# Altium PCB RC-RF004-HCS200_V1.a PCB DIMENSIONS.PcbDoc
Units mm, origin at the board's own origin, x right, y up, seen from the top; angles counter-clockwise.
Board outline 27.71 x 52.8 mm, 3 copper layers (Top Layer, Mid-Layer 17, Bottom Layer); 5 components, 0 nets, 14 pads, 0 vias.
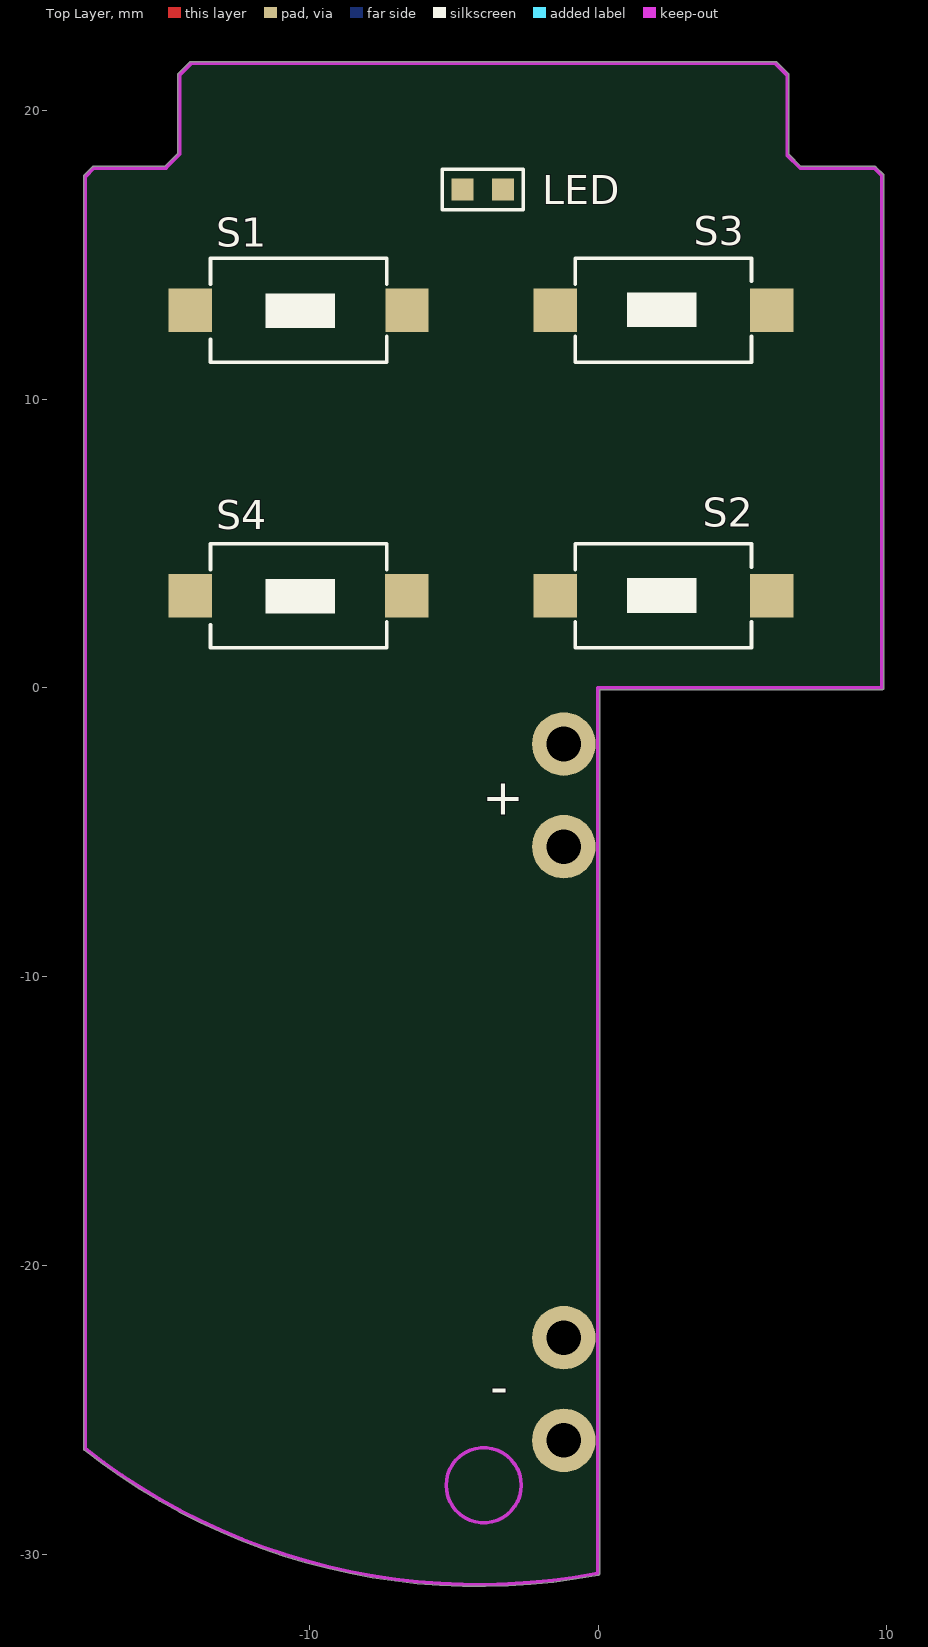
[diagram p0: Top Layer view]
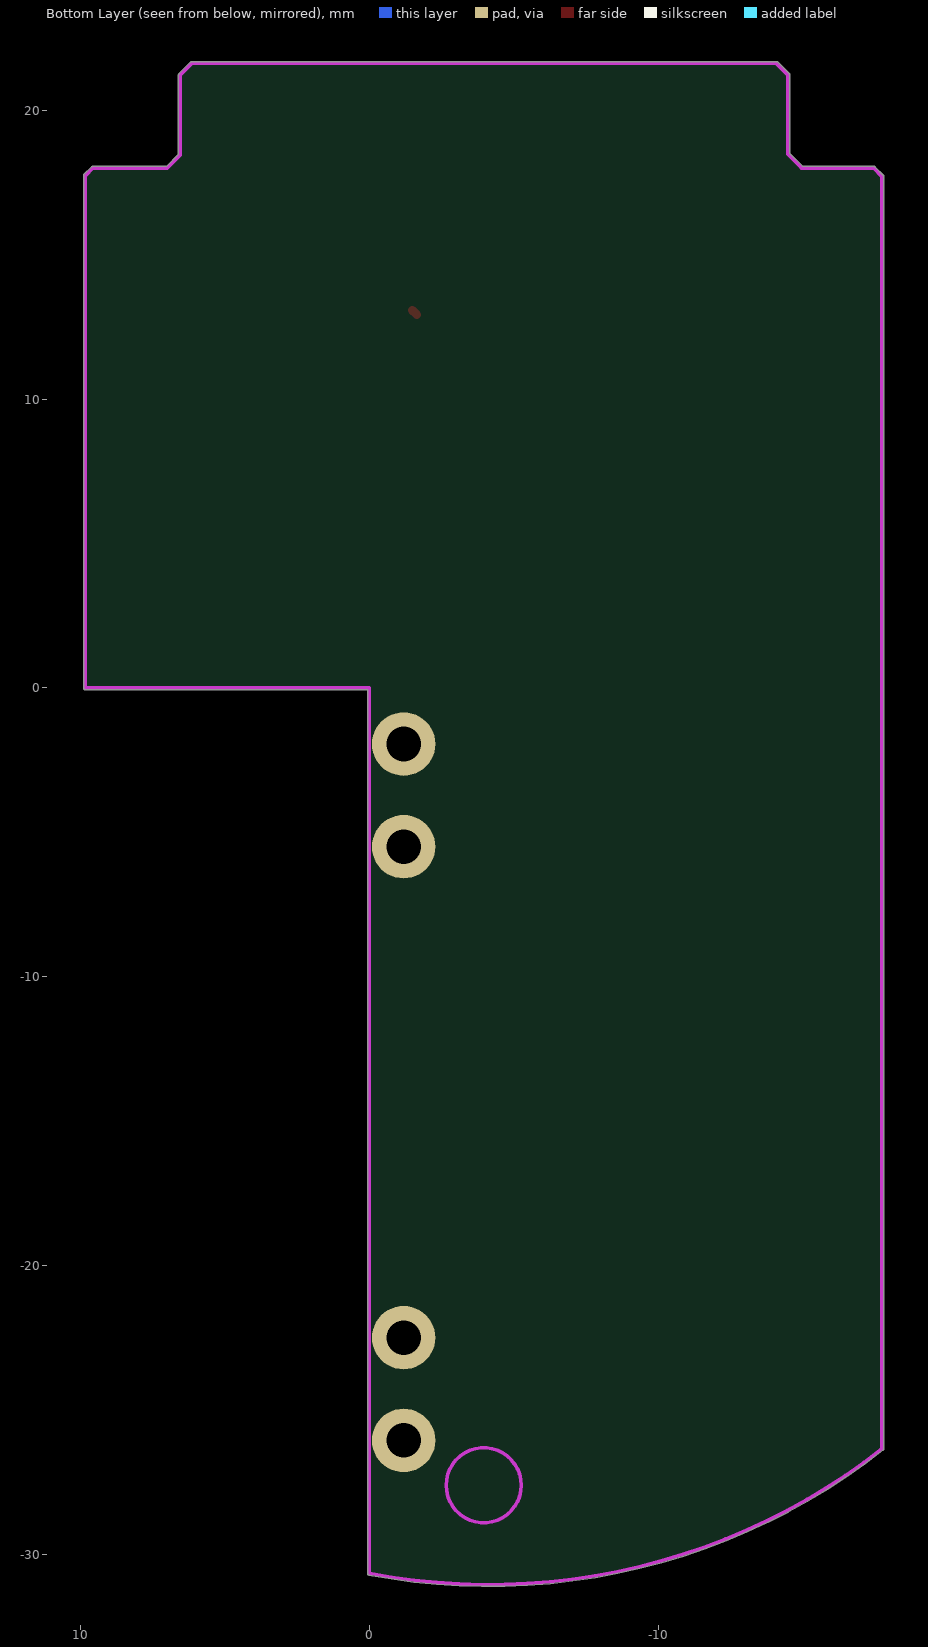
[diagram p1: Bottom Layer view, seen from below]

## Layer stack, top to bottom
Top Layer: signal copper 0.0356
Dielectric: dielectric 0.32, FR-4, Dk 4.8
Mid-Layer 17: signal copper 0.0356
Dielectric: dielectric 0.32, FR-4, Dk 4.8
Bottom Layer: signal copper 0.0356

## Board outline
-17.793,-26.392 cw(c-17.752,-26.343) -17.816,-26.343 -17.816,17.709 cw(c-17.752,17.709) -17.797,17.754 -17.512,18.039 cw(c-17.467,17.994) -17.467,18.058 -15.003,18.058 cw(c-14.951,18.021) -14.996,18.066 -14.557,18.505 -14.557,21.224 cw(c-14.493,21.224) -14.538,21.269 -14.138,21.669 cw(c-14.093,21.624) -14.093,21.688 6.146,21.688 cw(c6.146,21.624) 6.191,21.669 6.591,21.269 cw(c6.546,21.224) 6.61,21.224 6.61,18.476 6.61,18.477 7.028,18.058 9.576,18.058 cw(c9.576,17.994) 9.621,18.039 9.878,17.782 cw(c9.833,17.737) 9.897,17.737 9.897,0 cw(c9.833,0) 9.833,-0.064 0.064,-0.064 0.064,-30.658 cw(c0,-30.658) 0.011,-30.721 ccw(c-4.148,-9.047) 0.012,-30.721 0.011,-30.721 cw(c-4.148,-9.047) -17.791,-26.393 cw(c-17.752,-26.343)

## Design rules (kind name [scope] priority, off if disabled: settings)
Clearance [All] p1: gap=0.4
PolygonConnect PolygonConnect_1 [IsVia] p1: connectstyle=Direct reliefconductorwidth=0.3 reliefentries=4 polygonreliefangle="90 Angle" airgapwidth=0.254
PolygonConnect [All] p2: connectstyle=Relief reliefconductorwidth=0.3 reliefentries=4 polygonreliefangle="90 Angle" airgapwidth=0.4
RoutingVias [All] p1: holewidth=0.711 width=1.27 viastyle="Through Hole" minholewidth=0.711 minwidth=1.27 maxholewidth=0.711 maxwidth=1.27
SilkscreenOverComponentPads [All] p1: minsilkscreentomaskgap=0.254
SolderMaskExpansion [All] p1: expansion=0.102
Width [All] p1: maxlimit=1.2 minlimit=0.3 preferedwidth=0.4 toplayer_maxwidth=0.3 toplayer_prefwidth=0.3 midlayer17_maxwidth=0.3 midlayer17_prefwidth=0.3 bottomlayer_minwidth=0.4 minimp=50.000000 maximp=50.000000 favimp=50.000000
27 further rules are at their usual default settings.

## Classes and differential pairs
component class RC-RF004V3: S1 S2 S3

## Components (designator, comment, footprint, x,y, rotation, side; value= is the part's Value field where it differs from the comment)
LED "100pF" 0603 -4.692,17.254 r0 top
S1 "SW-PB" SW-SMD -14.118,13.076 r90 top
S2 "SW-PB" SW-SMD 6.013,3.187 r270 top
S3 "SW-PB" SW-SMD 6.013,13.076 r270 top
S4 "SW-PB" SW-SMD -14.12,3.187 r90 top

## Footprints (in the part's own frame and the unit in brackets; to place one, negate y for a bottom-side part, rotate by r counter-clockwise, add the part's x,y. Pads: shape width x height; smd on the part's side, far side on the other; paste and mask are expansions set on the pad)
0603 [mil]
  rect 30x30 smd: 1(0,0) 2(55,0)
  silkscreen extent -28,-28 83,28
SW-SMD [mm]
  rect 1.5x1.5 smd: 1(0,0) 2(0,-7.5)
  silkscreen extent -1.8,-6.8 1.8,-0.7

## Part data
LED: library part CAP

## Free pads (board coordinates)
  round 2.2 hole 1.2: 1(-1.187,-5.501) 1(-1.187,-1.945) 2(-1.187,-26.057) 2(-1.187,-22.501)

## Nets (pads, with @x,y where several pads share a name; then routed paths per layer and width w, separated by ;. In a path a pad name is that pad's centre, name@x,y a point inside that pad or via, vN(x,y) a via of type N, cw(c..) or ccw(c..) an arc to the next point about the centre after c; other vN are vias at no path point)
pads on no net: LED.1 LED.2 S1.1 S1.2 S2.1 S2.2 S3.1 S3.2 S4.1 S4.2
copper on no net: | length 0.2
  Top Layer w0.3: -1.637,12.926 -1.487,13.076

## Keep-outs
Keep-Out Layer:
  circle w0.127: c20.145,-0.101 r1.3
  circle w0.127: c-3.959,-27.609 r1.3
  lines w0.127: -14.951,17.994 -17.467,17.994 -17.752,17.709 -17.752,-26.343 ccw(c-4.148,-9.047) 0,-30.658 0,0 9.833,0 9.833,17.737 9.576,17.994 9.518,17.994 7.002,17.994 6.546,18.45 6.546,18.479 6.546,21.224 6.146,21.624 -13.979,21.624 -14.093,21.624 -14.493,21.224 -14.493,18.479 -14.951,18.021
  text "零件禁置區" at 25.552,7.315 h4
  text "定位孔" at 25.4,-0.889 h4

## Silkscreen, mask and mechanical layers (free items; w line width, h text height)
Top Overlay:
  text "+" at -4.013,-3.328 h1.27 r180
  text "-" at -3.734,-23.876 h1.27 r180
Mechanical 1:
  circle w0.127: c20.255,8.434 r3
  circle w0.127: c-4.053,8.942 r3
  lines w0.127: -6.618,7.376 -6.618,10.476 ; -6.118,6.776 -6.118,11.076 ; -5.618,6.376 -5.618,11.476 ; -5.259,-27.609 -2.659,-27.609 ; -5.119,-28.109 -2.819,-28.109 ; -5.118,6.176 -5.118,11.676 ; -5.1,-27.109 -2.8,-27.109 ; -4.769,-28.609 -3.169,-28.609 ; -4.75,-26.609 -3.15,-26.609 ; -4.618,6.076 -4.618,11.776 ; -4.118,5.976 -4.118,11.876 ; -3.618,5.976 -3.618,11.876 ; -3.118,6.126 -3.118,11.776 ; -2.618,6.376 -2.618,11.576 ; -2.118,6.676 -2.118,11.176 ; -1.618,7.176 -1.618,10.676 ; 17.69,6.868 17.69,9.968 ; 18.19,6.268 18.19,10.568 ; 18.69,5.868 18.69,10.968 ; 18.845,-0.101 21.445,-0.101 ; 18.986,-0.601 21.286,-0.601 ; 19.005,0.399 21.305,0.399 ; 19.19,5.668 19.19,11.168 ; 19.336,-1.101 20.936,-1.101 ; 19.355,0.899 20.955,0.899 ; 19.69,5.568 19.69,11.268 ; 20.19,5.468 20.19,11.368 ; 20.69,5.468 20.69,11.368 ; 21.19,5.618 21.19,11.268 ; 21.69,5.868 21.69,11.068 ; 22.19,6.168 22.19,10.668 ; 22.69,6.668 22.69,10.168

## Dimensions
-5.259,-27.609 to -2.659,-27.609 on Keep-Out Layer
0,0 to 9.833,0 on Mechanical 1
-17.752,17.709 to 9.833,0 on Mechanical 1
-7.053,8.942 to -1.053,8.942 on Mechanical 1